# Altium PCB pcb_take1.PcbDoc (part 2 of 3)
Units mm, origin at the board's own origin, x right, y up, seen from the top; angles counter-clockwise.
Board outline 120 x 150 mm, 10 copper layers (Top Layer, Mid-Layer 1, Internal Plane 1, Internal Plane 2, Mid-Layer 2, MidLayer3, Mid-Layer 4, Mid-Layer 5, Mid-Layer 6, Bottom Layer); 173 components, 196 nets, 996 pads, 586 vias.
Unrouted connection lines stored in the file: 1.
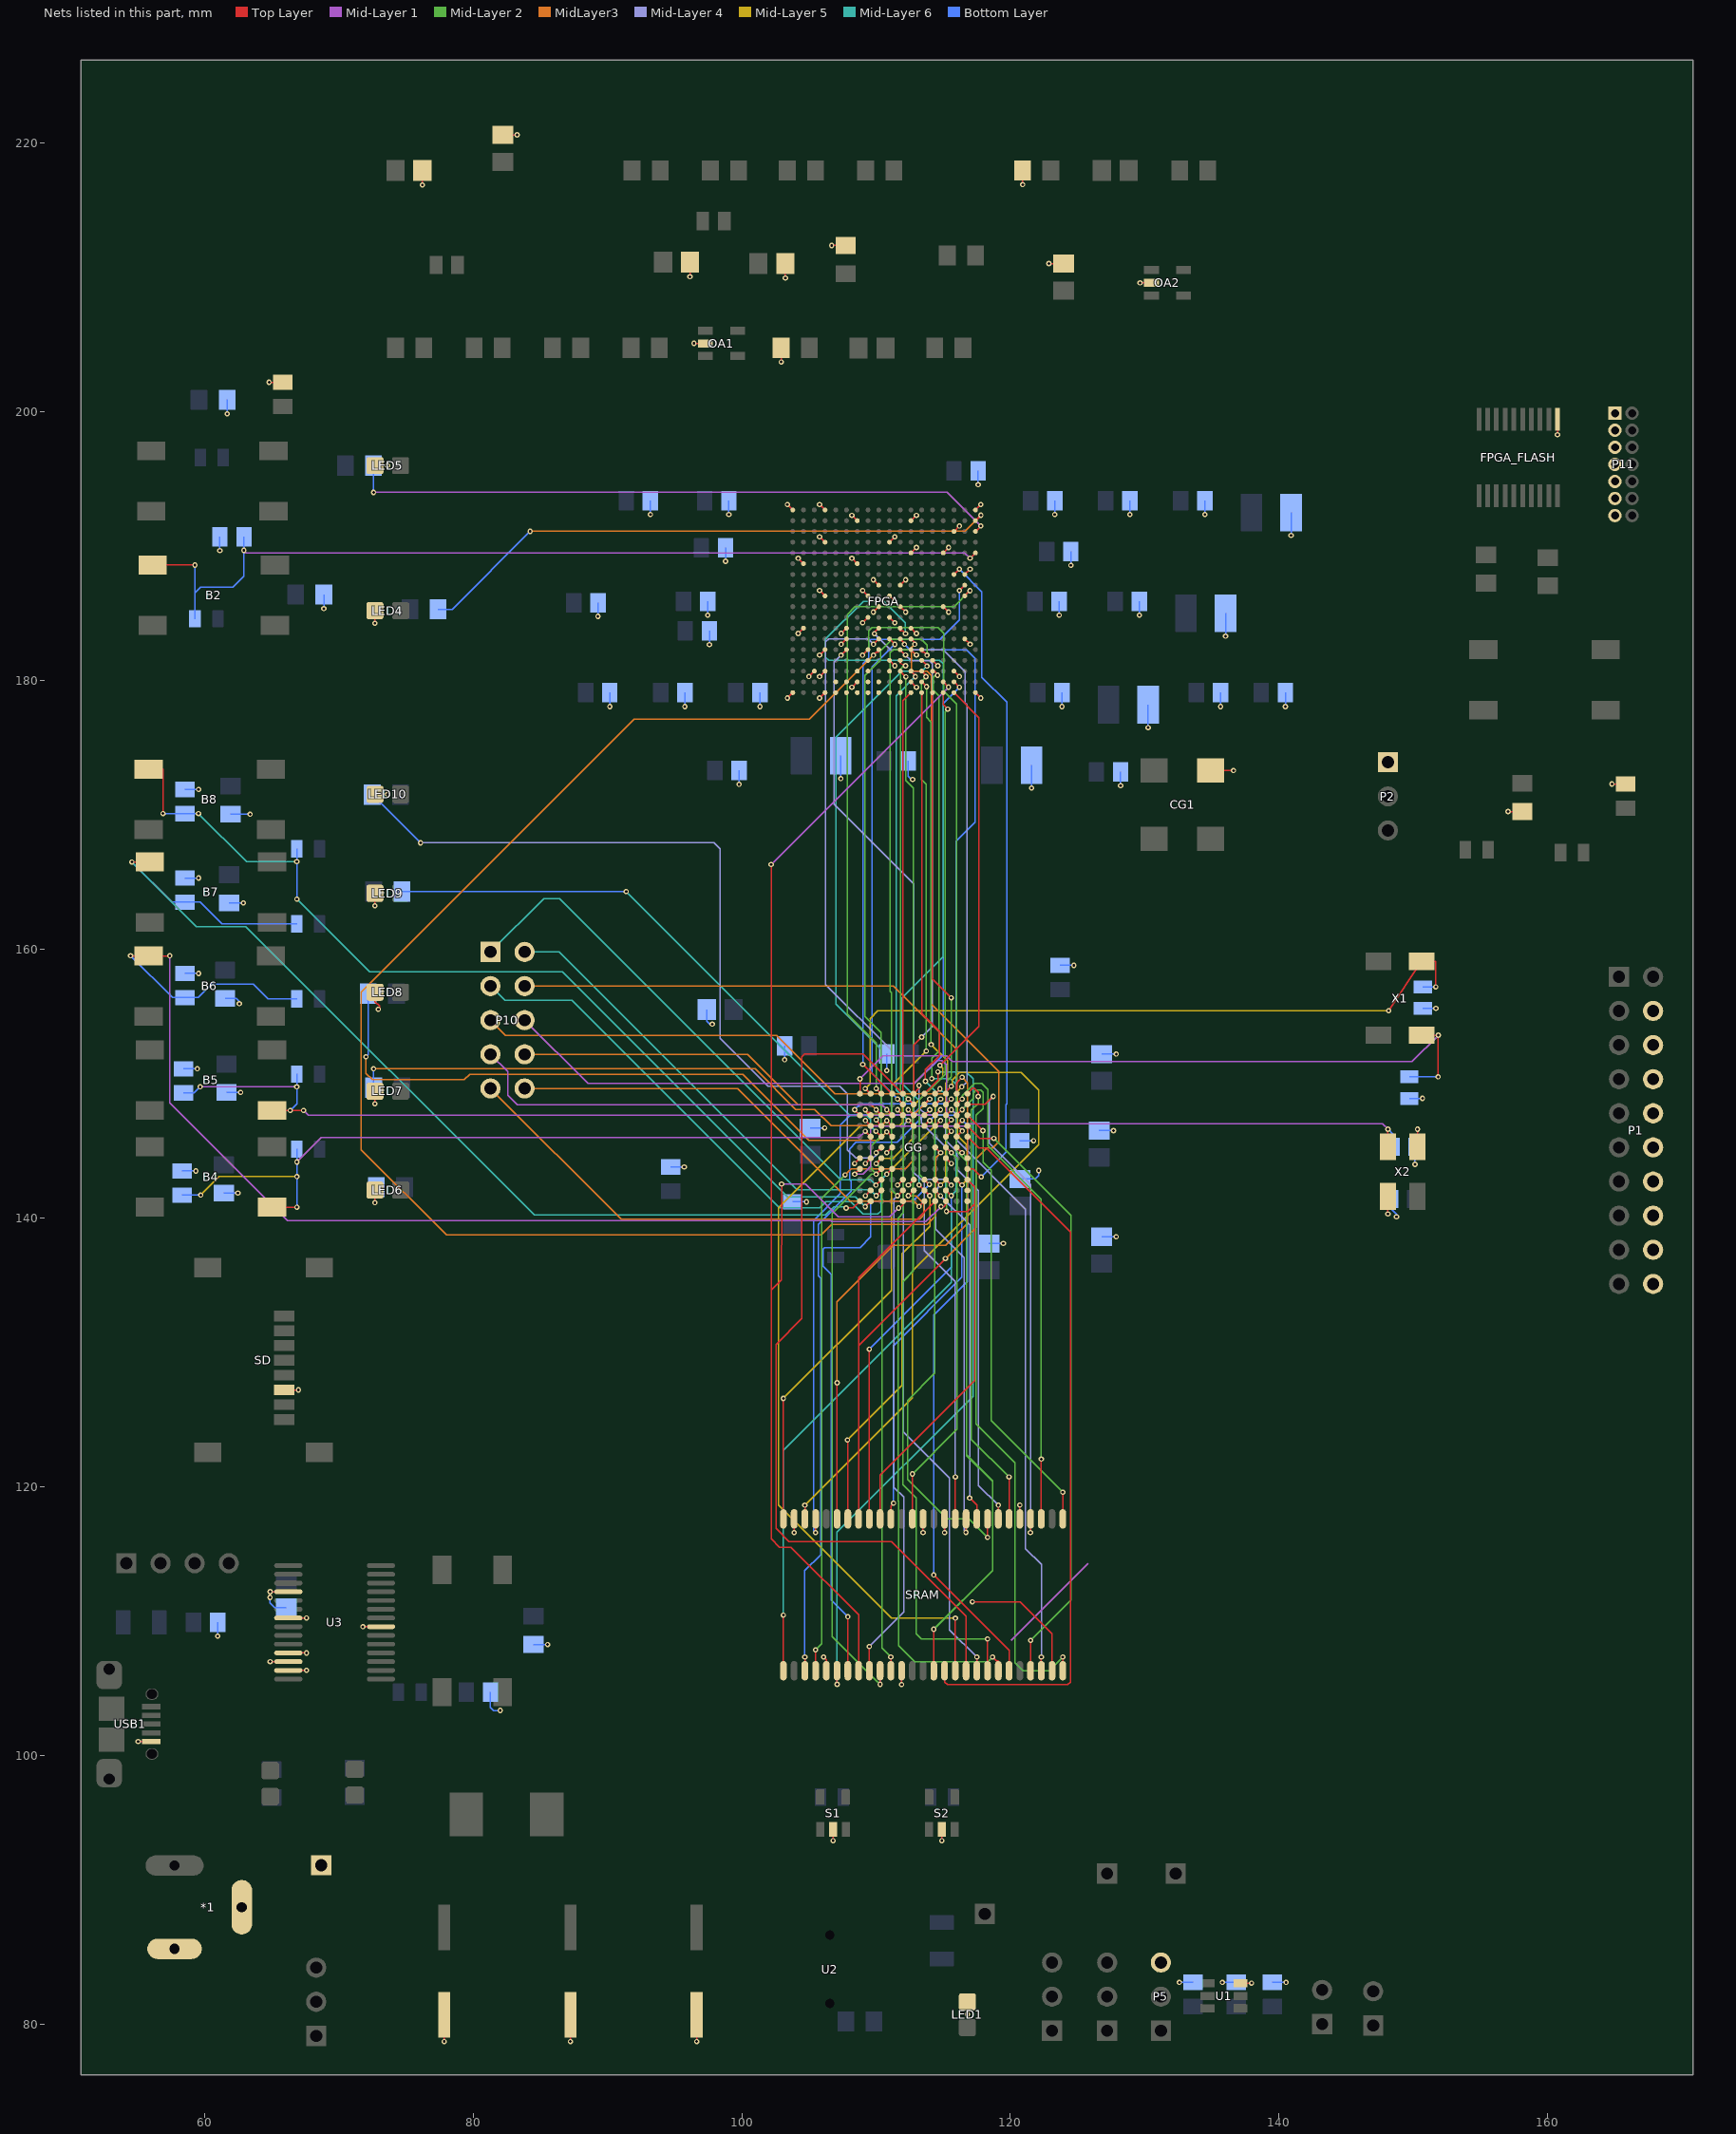
[diagram p10: the nets of this part, all layers, seen from the top]

## Via types
v1: diameter 0.4, hole 0.2, Top Layer to Bottom Layer, 586 vias

## Nets (pads, with @x,y where several pads share a name; then routed paths per layer and width w, separated by ;. In a path a pad name is that pad's centre, name@x,y a point inside that pad or via, vN(x,y) a via of type N, cw(c..) or ccw(c..) an arc to the next point about the centre after c; other vN are vias at no path point) (continued)
ARM_HFXTAL_P: C43.1 GG.L8 X2.1 | length 46.5
  Top Layer w0.1: v1(108.407,143.256) GG.L8@108.8,143.65 ; X2.1@148.1,145.3 148.1,146.601 v1(148.107,146.609)
  Mid-Layer 1 w0.1: v1(108.407,143.256) 109.042,143.256 109.601,143.815 109.601,146.71 109.728,146.837 116.611,146.837 116.789,147.015 147.701,147.015 v1(148.107,146.609)
  Bottom Layer w0.1: v1(148.107,146.609) 148.5,146.216 C43.1@148.5,145.3
ARM_LFXTAL_N: C42.2 GG.L1 X1.1 | length 53.6
  Top Layer w0.1: GG.L1@108.8,149.25 v1(108.8,150.354) ; v1(151.841,150.5) 151.841,153.591 X1.1@150.6,153.6 v1(151.85,153.6)
  Mid-Layer 1 w0.1: v1(108.8,150.354) 110.509,152.063 115.258,152.063 115.67,151.65 149.9,151.65 v1(151.85,153.6)
  Bottom Layer w0.1: C42.2@149.7,150.5 v1(151.841,150.5)
ARM_LFXTAL_P: C41.2 GG.K1 X1.2 | length 53.1
  Top Layer w0.1: v1(109.195,149.631) 109.219,149.631 GG.K1@109.6,149.25 ; v1(148.158,155.423) X1.2@150.6,159.1 151.663,159.1 v1(151.663,157.2)
  Mid-Layer 5 w0.1: v1(109.195,149.631) 109.55,149.987 109.55,154.838 110.134,155.423 v1(148.158,155.423)
  Bottom Layer w0.1: C41.2@150.7,157.2 v1(151.663,157.2)
CTRL_BUS0: FPGA.C7 GG.A8 | length 49.3
  Top Layer w0.1: FPGA.C7@115.8,187.9 116.19,188.29 v1(116.205,188.29) ; GG.A8@116.8,143.65 117.233,143.65 v1(117.831,143.053)
  Bottom Layer w0.1: v1(116.205,188.29) 117.881,186.614 117.881,180.238 119.736,178.384 119.736,148.514 119.659,148.438 119.659,144.882 v1(117.831,143.053)
CTRL_BUS1: FPGA.B8 GG.H1 | length 44.9
  Top Layer w0.1: v1(109.017,151.433) GG.H1@111.2,149.25 ; v1(116.198,186.698) FPGA.B8@116.6,187.1
  Bottom Layer w0.1: v1(109.017,151.433) 109.017,181.254 109.449,181.686 109.449,182.88 109.626,183.058 114.757,183.058 116.198,184.499 v1(116.198,186.698)
CTRL_BUS2: FPGA.B9 GG.J1 | length 47.2
  Top Layer w0.1: v1(110.007,149.631) 110.019,149.631 GG.J1@110.4,149.25 ; FPGA.B9@116.6,186.3 116.99,186.69 v1(116.992,186.69)
  Mid-Layer 2 w0.1: v1(110.007,149.631) 110.007,153.01 107.848,155.169 107.848,184.912 108.433,185.496 115.799,185.496 v1(116.992,186.69)
EBI_A0: FPGA.F15 GG.J4 | length 40.2
  Top Layer w0.1: v1(110.007,147.295) 110.007,147.243 GG.J4@110.4,146.85 ; FPGA.F15@113.4,181.5 113.792,181.108 v1(113.792,181.077)
  Mid-Layer 6 w0.1: v1(110.007,147.295) 110.363,147.65 110.363,152.552 107.01,155.905 107.01,175.793 111.912,180.696 113.411,180.696 v1(113.792,181.077)
EBI_A1: FPGA.F16 GG.K3 | length 37.3
  Top Layer w0.1: v1(109.195,148.057) 109.398,147.853 109.6,147.853 GG.K3@109.6,147.65 ; FPGA.F16@113.4,180.7 113.716,180.384 v1(113.716,180.289)
  Mid-Layer 2 w0.1: v1(113.716,180.289) 113.36,179.934 113.36,172.651 113.741,172.27 v1(113.741,152.425)
  Mid-Layer 5 w0.1: v1(109.195,148.057) 109.195,147.93 109.423,147.701 110.947,147.701 111.15,147.904 111.15,149.835 v1(113.741,152.425)
EBI_A2: FPGA.C17 GG.L3 | length 38
  Top Layer w0.1: v1(108.407,148.057) 108.407,148.043 GG.L3@108.8,147.65 ; FPGA.C17@115.8,179.9 116.198,179.502 v1(116.205,179.502)
  Bottom Layer w0.1: v1(108.407,148.057) 108.839,148.488 112.573,148.488 112.827,148.742 112.827,149.994 114.986,152.153 114.986,178.283 v1(116.205,179.502)
EBI_A3: FPGA.C18 GG.J7 SRAM.11 | length 78.4
  Top Layer w0.1: v1(110.007,144.043) 110.007,144.057 GG.J7@110.4,144.45 ; SRAM.11@111.1,106.3 v1(111.1,107.315) ; v1(114.757,151.359) 117.653,154.254 117.653,177.247 FPGA.C18@115.8,179.1
  Mid-Layer 2 w0.1: v1(110.007,144.043) 110.439,143.612 110.439,107.976 v1(111.1,107.315)
  Mid-Layer 5 w0.1: v1(110.007,144.043) 110.388,144.424 111.252,144.424 112.751,145.923 112.751,148.322 114.955,150.526 114.955,151.161 v1(114.757,151.359)
EBI_A4: FPGA.F14 GG.J8 SRAM.10 | length 88.4
  Top Layer w0.1: v1(110.007,143.257) GG.J8@110.4,143.65 ; v1(110.3,105.283) SRAM.10@110.3,106.3 ; FPGA.F14@113.4,182.3 113.4,182.093 113.589,182.093 v1(113.792,181.889)
  Mid-Layer 2 w0.1: v1(110.3,105.283) 106.731,108.852 106.731,140.335 109.652,143.257 v1(110.007,143.257) 109.626,143.637 109.626,145.364 110.363,146.101 110.363,153.797 109.169,154.991 109.169,180.361 110.342,181.534 110.342,182.224 111.176,183.058 113.386,183.058 113.792,182.651 v1(113.792,181.889)
EBI_A5: FPGA.G14 GG.G10 SRAM.9 | length 80.8
  Top Layer w0.1: SRAM.9@109.5,106.3 v1(109.5,108.102) ; v1(111.6,141.656) 111.606,141.656 GG.G10@112,142.05 ; FPGA.G14@112.6,182.3 112.995,181.905 v1(113.005,181.905)
  Mid-Layer 2 w0.1: v1(111.6,141.656) 111.15,142.105 111.15,156.769 111.049,156.87 111.049,182.067 111.277,182.296 112.614,182.296 v1(113.005,181.905)
  Mid-Layer 4 w0.1: v1(109.5,108.102) 112.059,110.662 112.059,119.224 111.334,119.949 111.334,141.39 v1(111.6,141.656)
EBI_A6: FPGA.D17 GG.G11 SRAM.8 | length 101.3
  Top Layer w0.1: v1(102.192,166.308) 102.192,134.628 ; v1(102.972,142.519) 102.972,140.589 102.946,135.382 102.192,134.628 ; SRAM.8@108.7,106.3 108.7,110.465 103.671,115.494 102.819,115.494 102.192,116.121 102.192,134.628 ; v1(111.684,140.741) 111.76,140.741 112,140.981 GG.G11@112,141.25 ; FPGA.D17@115,179.9 v1(115.392,179.508)
  Mid-Layer 1 w0.1: v1(102.192,166.308) v1(115.392,179.508) ; v1(102.972,142.519) 104.75,142.519 107.198,140.071 111.014,140.071 v1(111.684,140.741)
EBI_A7: FPGA.D18 GG.E9 SRAM.7 | length 81.9
  Top Layer w0.1: SRAM.7@107.9,106.3 v1(107.9,110.312) ; GG.E9@113.6,142.85 113.956,142.494 v1(113.97,142.494) ; FPGA.D18@115,179.1 115,178.218 v1(115.341,177.876)
  Mid-Layer 2 w0.1: v1(113.97,142.494) 113.25,143.214 113.25,148.81 115.138,150.698 115.138,177.673 v1(115.341,177.876)
  Bottom Layer w0.1: v1(107.9,110.312) 106.655,111.558 106.655,135.814 106.046,136.422 106.046,137.669 106.172,137.795 108.814,137.795 109.601,138.582 109.601,141.021 109.83,141.249 112.725,141.249 v1(113.97,142.494)
EBI_A8: FPGA.H12 GG.E10 SRAM.48 | length 87.9
  Top Layer w0.1: v1(107.874,123.47) 107.9,123.444 SRAM.48@107.9,117.6 ; FPGA.H12@111.8,183.9 111.8,183.693 111.989,183.693 v1(112.192,183.49) ; v1(113.198,142.452) GG.E10@113.6,142.05 v1(113.995,141.655)
  Mid-Layer 5 w0.1: v1(107.874,123.47) 111.938,127.534 111.938,137.312 113.995,139.37 v1(113.995,141.655)
  Mid-Layer 6 w0.1: v1(112.192,183.49) 112.192,184.302 110.592,185.903 109.068,185.903 106.248,183.083 106.248,181.737 106.477,181.508 114.732,181.508 114.986,181.254 114.986,159.443 111.875,156.332 111.875,150.065 113.198,148.742 v1(113.198,142.452)
EBI_A9: FPGA.G13 GG.D11 SRAM.47 | length 86.7
  Top Layer w0.1: SRAM.47@108.7,117.6 108.7,130.519 ; FPGA.G13@112.6,183.1 112.878,182.822 v1(112.878,182.702) ; GG.D11@114.4,141.25 108.7,135.55 108.7,130.519 ; v1(115.164,136.982) 108.7,130.519
  MidLayer3 w0.1: v1(112.878,182.702) 112.649,182.474 112.649,180.823 112.776,180.696 113.817,180.696 114.122,180.391 114.122,155.905 119.126,150.901 119.126,145.669 118.669,145.212 118.262,145.212 117.45,144.399 117.45,139.268 v1(115.164,136.982)
EBI_A10: FPGA.E16 GG.C10 SRAM.46 | length 68.8
  Top Layer w0.1: SRAM.46@109.5,117.6 v1(109.5,130.234) ; FPGA.E16@114.2,180.7 114.376,180.7 v1(114.579,180.391) ; GG.C10@115.2,142.05 v1(115.595,141.656)
  Mid-Layer 2 w0.1: v1(114.148,150.368) 114.148,151.892 114.683,152.427 114.683,178.865 114.249,179.299 114.249,180.238 114.402,180.391 v1(114.579,180.391)
  Mid-Layer 6 w0.1: v1(114.148,150.368) 115.545,150.368 115.951,149.962 115.951,142.011 v1(115.595,141.656)
  Bottom Layer w0.1: v1(109.5,130.234) 115.595,136.329 v1(115.595,141.656)
EBI_A11: FPGA.E18 GG.A9 SRAM.45 | length 70.1
  Top Layer w0.1: SRAM.45@110.3,117.6 110.3,120.841 117.348,127.889 117.348,141.021 ; FPGA.E18@114.2,179.1 114.2,157.783 v1(115.595,156.388) ; v1(115.24,140.487) 116.815,140.487 117.348,141.021 ; GG.A9@116.8,142.85 117.348,142.302 117.348,141.021
  Mid-Layer 2 w0.1: v1(115.24,140.487) 115.24,150.165 115.595,150.52 v1(115.595,156.388)
EBI_A12: FPGA.K12 GG.B9 SRAM.44 | length 75.1
  Top Layer w0.1: v1(109.88,183.49) 109.88,183.58 FPGA.K12@110.2,183.9 ; SRAM.44@111.1,117.6 111.1,118.568 v1(111.303,118.77) ; GG.B9@116,142.85 v1(116.395,142.455)
  Mid-Layer 4 w0.1: v1(109.88,183.49) 111.074,182.296 115.011,182.296 116.637,180.67 116.637,178.333 116.764,178.206 116.764,150.139 v1(116.383,149.758)
  Mid-Layer 5 w0.1: v1(116.383,149.758) 116.053,149.428 116.053,146.126 116.764,145.415 116.764,142.824 v1(116.395,142.455)
  Bottom Layer w0.1: v1(111.303,118.77) 111.303,130.488 116.395,135.58 v1(116.395,142.455)
EBI_A13: FPGA.K13 GG.C9 SRAM.38 | length 77.4
  Top Layer w0.1: v1(109.802,182.702) FPGA.K13@110.2,183.1 ; GG.C9@115.2,142.85 115.595,142.455 v1(115.595,142.443) ; SRAM.38@115.9,117.6 v1(115.9,120.726)
  Mid-Layer 4 w0.1: v1(109.802,182.702) 109.396,183.109 106.477,183.109 106.248,182.88 106.248,157.378 111.15,152.476 111.15,147.853 111.354,147.65 112.627,147.65 112.754,147.523 112.754,143.459 113.338,142.875 113.792,142.875 ; v1(115.595,142.443) 115.164,142.875 113.792,142.875 ; v1(115.9,120.726) 115.9,135.28 113.589,137.592 113.589,142.672 113.792,142.875
EBI_A14: FPGA.F17 GG.D9 SRAM.37 | length 67
  Top Layer w0.1: FPGA.F17@113.4,179.9 v1(113.757,179.543) ; GG.D9@114.4,142.85 v1(114.8,142.45) ; v1(116.688,116.598) 116.7,116.611 SRAM.37@116.7,117.6
  Mid-Layer 2 w0.1: v1(113.757,179.543) 113.757,177.27 114.097,176.93 v1(114.097,152.908)
  Mid-Layer 4 w0.1: v1(114.8,142.45) 114.427,142.077 114.427,139.15 116.542,137.035 116.542,116.744 v1(116.688,116.598)
  Mid-Layer 5 w0.1: v1(114.097,152.908) 115.309,151.696 115.309,150.172 115.164,150.027 115.164,142.814 v1(114.8,142.45)
EBI_A15: FPGA.F18 GG.D10 SRAM.36 | length 64.6
  Top Layer w0.1: FPGA.F18@113.4,179.1 113.4,155.224 114.703,153.921 114.703,152.069 113.676,151.042 v1(113.676,150.18) ; GG.D10@114.4,142.05 v1(114.8,141.65) ; v1(116.967,119.151) 117.5,118.618 SRAM.36@117.5,117.6
  Mid-Layer 4 w0.1: v1(114.8,141.65) 116.967,139.483 v1(116.967,119.151)
  Mid-Layer 6 w0.1: v1(113.676,150.18) 114.402,149.454 114.402,142.048 v1(114.8,141.65)
EBI_A16: FPGA.H13 GG.E4 SRAM.35 | length 80.2
  Top Layer w0.1: FPGA.H13@111.8,183.1 112.116,182.784 v1(112.116,182.702) ; GG.E4@113.6,146.85 113.994,147.244 v1(113.995,147.244) ; v1(118.3,116.23) SRAM.35@118.3,117.6
  Mid-Layer 2 w0.1: v1(113.995,147.244) 114.376,146.863 114.376,128.448 112.344,126.416 112.344,120.53 115.272,117.602 116.928,117.602 v1(118.3,116.23)
  Bottom Layer w0.1: v1(112.116,182.702) 112.522,182.296 116.738,182.296 117.373,181.661 117.373,169.469 115.951,168.046 115.951,147.777 115.824,147.65 114.402,147.65 v1(113.995,147.244)
EBI_A17: FPGA.H14 GG.F1 SRAM.34 | length 71.6
  Top Layer w0.1: FPGA.H14@111.8,182.3 v1(112.192,181.908) ; v1(113.2,149.853) 113.2,149.65 GG.F1@112.8,149.25 112.8,152.87 v1(113.391,153.461) ; SRAM.34@119.1,117.6 v1(119.1,118.618)
  Mid-Layer 4 w0.1: v1(112.192,181.908) 112.642,181.458 113.97,181.458 114.173,181.254 114.173,154.243 v1(113.391,153.461) ; v1(113.2,149.853) 113.2,148.191 113.716,147.676 115.037,147.676 115.189,147.523 115.189,145.762 116.025,144.926 116.025,143.614 117.627,142.011 117.627,120.091 v1(119.1,118.618)
EBI_A18: FPGA.H15 GG.F2 SRAM.21 | length 83.9
  Top Layer w0.1: FPGA.H15@111.8,181.5 111.8,181.305 v1(112.192,181.102) ; v1(112.395,148.844) v1(112.406,148.844) GG.F2@112.8,148.45 ; v1(118.669,107.315) 118.948,107.036 119.1,107.036 SRAM.21@119.1,106.3
  Mid-Layer 2 w0.1: v1(112.192,181.102) 112.065,181.102 111.811,180.848 111.811,149.439 v1(112.406,148.844) ; v1(112.395,148.844) 112.034,148.483 112.034,140.391 111.633,139.991 111.633,118.948 111.684,118.897 111.684,108.153 112.878,106.959 118.313,106.959 v1(118.669,107.315)
EBI_A19: FPGA.H16 GG.F3 SRAM.20 | length 94.4
  Top Layer w0.1: FPGA.H16@111.8,180.7 v1(112.217,180.283) ; v1(112.395,148.057) 112.395,148.055 GG.F3@112.8,147.65 ; SRAM.20@118.3,106.3 v1(118.3,108.661)
  Mid-Layer 2 w0.1: v1(112.217,180.283) 112.217,172.568 112.776,172.009 112.776,136.042 111.989,135.255 ; v1(112.395,148.057) 112.751,147.701 112.751,136.068 111.989,135.255 ; v1(118.3,108.661) 113.386,108.661 112.979,109.068 112.979,119.151 111.989,120.142 111.989,135.255
EBI_A20: FPGA.G16 GG.F4 SRAM.19 | length 78.5
  Top Layer w0.1: v1(112.4,147.25) GG.F4@112.8,146.85 ; FPGA.G16@112.6,180.7 112.928,180.372 v1(112.928,180.289) ; SRAM.19@117.5,106.3 v1(117.5,107.315)
  Mid-Layer 4 w0.1: v1(112.4,147.25) 112.039,146.889 112.039,124.079 115.468,120.65 115.468,109.347 v1(117.5,107.315)
  Mid-Layer 6 w0.1: v1(112.4,147.25) 112.039,147.611 112.039,148.996 111.506,149.53 111.506,178.867 v1(112.928,180.289)
EBI_A21: FPGA.G18 GG.G1 SRAM.18 | length 95.8
  Top Layer w0.1: FPGA.G18@112.6,179.1 112,178.5 GG.G1@112,149.25 109.028,152.222 104.699,152.222 104.47,151.994 104.47,132.512 102.546,130.588 102.546,116.885 103.505,115.926 111.137,115.926 116.7,110.363 SRAM.18@116.7,106.3
EBI_A22: FPGA.J13 GG.G2 SRAM.17 | length 92.9
  Top Layer w0.1: FPGA.J13@111,183.1 111.398,182.702 v1(111.398,182.696) ; v1(111.6,148.85) GG.G2@112,148.45 ; SRAM.17@115.9,106.3 v1(115.9,110.211)
  Mid-Layer 5 w0.1: v1(111.6,148.85) 111.963,148.487 111.963,147.066 111.76,146.863 108.839,146.863 102.743,140.767 102.743,118.618 111.15,110.211 v1(115.9,110.211)
  Bottom Layer w0.1: v1(111.398,182.696) 109.703,181 109.703,150.747 v1(111.6,148.85)
EBI_AD0: GG.B4 SRAM.22 | length 45.1
  Top Layer w0.1: v1(114.3,113.423) 119.9,107.823 SRAM.22@119.9,106.3 ; GG.B4@116,146.85 v1(116.419,147.269)
  Bottom Layer w0.1: v1(114.3,113.423) 114.3,132.777 116.789,135.266 116.789,146.899 v1(116.419,147.269)
EBI_AD1: GG.A4 SRAM.24 | length 53.7
  Top Layer w0.1: GG.A4@116.8,146.85 117.727,145.923 v1(118.77,145.923) ; SRAM.24@121.5,106.3 v1(121.5,108.56)
  Mid-Layer 1 w0.1: 120.04,108.56 125.781,114.3
  Mid-Layer 2 w0.1: v1(118.77,145.923) 124.511,140.183 124.511,111.57 v1(121.5,108.56)
EBI_AD2: GG.C3 SRAM.25 | length 45.1
  Top Layer w0.1: GG.C3@115.2,147.65 115.6,148.05 v1(115.6,148.057) ; SRAM.25@122.3,106.3 v1(122.301,107.315) v1(122.301,107.315)
  Mid-Layer 4 w0.1: v1(115.6,148.057) 115.956,147.701 115.956,145.842 121.133,140.665 121.133,115.392 122.301,114.224 v1(122.301,107.315)
EBI_AD3: GG.B3 SRAM.27 | length 52.1
  Top Layer w0.1: GG.B3@116,147.65 116.407,148.057 v1(116.408,148.057) ; SRAM.27@123.9,106.3 123.9,107.313 v1(123.901,107.314)
  Mid-Layer 2 w0.1: v1(116.408,148.057) 117.222,148.871 117.222,149.278 117.45,149.506 117.802,149.506 117.956,149.352 117.956,148.145 117.458,147.648 117.458,124.68 120.345,121.793 120.345,106.883 120.928,106.3 122.888,106.3 v1(123.901,107.314)
EBI_AD4: GG.A3 SRAM.28 | length 33
  Top Layer w0.1: GG.A3@116.8,147.65 v1(117.956,146.494) ; SRAM.28@123.9,117.6 v1(123.9,119.583)
  Mid-Layer 2 w0.1: v1(117.956,146.494) 117.956,144.152 118.562,143.547 118.562,124.922 v1(123.9,119.583)
EBI_AD5: GG.B2 SRAM.30 | length 36.9
  Top Layer w0.1: GG.B2@116,148.45 116.394,148.844 v1(116.408,148.844) ; SRAM.30@122.3,117.6 v1(122.3,122.047)
  Mid-Layer 2 w0.1: v1(116.408,148.844) 116.408,149.095 117.328,150.015 117.856,150.015 118.31,149.561 118.31,145.39 122.3,141.401 v1(122.3,122.047)
EBI_AD6: GG.A2 SRAM.31 | length 37
  Top Layer w0.1: GG.A2@116.8,148.45 118.122,148.45 v1(118.72,149.047) ; v1(121.488,116.586) 121.5,116.598 SRAM.31@121.5,117.6
  Mid-Layer 4 w0.1: v1(118.72,149.047) 118.42,148.748 118.42,145.573 121.488,142.505 v1(121.488,116.586)
EBI_AD7: GG.A1 SRAM.33 | length 34.2
  Top Layer w0.1: GG.A1@116.8,149.25 117.207,149.657 117.297,149.657 117.602,149.352 v1(117.602,149.047) ; SRAM.33@119.9,117.6 v1(119.9,120.726)
  Mid-Layer 2 w0.1: v1(117.602,149.047) 117.602,148.532 117.104,148.034 117.104,123.522 v1(119.9,120.726)
EBI_AD8: GG.B1 SRAM.49 | length 40.7
  Top Layer w0.1: SRAM.49@107.1,117.6 v1(107.1,127.737) ; GG.B1@116,149.25 116,150.061 v1(116.408,150.47)
  MidLayer3 w0.1: v1(107.1,127.737) 107.1,133.77 111.303,137.973 115.189,137.973 116.815,139.598 116.815,150.063 v1(116.408,150.47)
EBI_AD9: GG.C2 SRAM.51 | length 41.9
  Top Layer w0.1: v1(105.5,116.586) SRAM.51@105.5,117.6 ; GG.C2@115.2,148.45 115.594,148.844 v1(115.595,148.844)
  Bottom Layer w0.1: v1(105.5,116.586) 105.338,116.748 105.338,139.806 107.346,141.814 107.346,146.919 108.102,147.676 112.751,147.676 113.563,148.488 115.24,148.488 v1(115.595,148.844)
EBI_AD10: GG.C1 SRAM.52 | length 47.5
  Top Layer w0.1: SRAM.52@104.7,117.6 v1(104.7,118.618) ; GG.C1@115.2,149.25 115.341,149.555 v1(115.595,149.809)
  Mid-Layer 5 w0.1: v1(104.7,118.618) 112.7,126.618 112.7,136.042 122.098,145.44 122.098,149.504 120.783,150.82 116.205,150.82 115.663,150.277 115.663,149.877 v1(115.595,149.809)
EBI_AD11: GG.D2 SRAM.54 | length 36.7
  Top Layer w0.1: SRAM.54@103.1,117.6 v1(103.1,126.57) ; GG.D2@114.4,148.45 114.794,148.844 v1(114.808,148.844)
  Mid-Layer 5 w0.1: v1(103.1,126.57) 111.15,134.62 111.15,143.612 114.402,146.863 114.402,148.438 v1(114.808,148.844)
EBI_AD12: GG.D1 SRAM.1 | length 49.3
  Top Layer w0.1: SRAM.1@103.1,106.3 v1(103.1,110.439) ; GG.D1@114.4,149.25 v1(114.757,149.606)
  Mid-Layer 6 w0.1: v1(103.1,110.439) 103.1,122.709 115.595,135.204 115.595,140.843 115.164,141.275 115.164,149.2 v1(114.757,149.606)
EBI_AD13: GG.E3 SRAM.3 | length 48.2
  Top Layer w0.1: v1(104.699,107.315) v1(104.699,107.315) SRAM.3@104.7,106.3 ; GG.E3@113.6,147.65 113.995,148.045 v1(113.995,148.057)
  Bottom Layer w0.1: v1(104.699,107.315) 104.699,113.767 105.867,114.935 105.867,135.51 105.692,135.685 105.692,139.525 108.153,141.986 108.153,142.748 108.052,142.85 108.052,143.916 108.026,143.942 108.026,145.136 108.509,145.618 111.557,145.618 v1(113.995,148.057)
EBI_AD14: GG.E2 SRAM.4 | length 49
  Top Layer w0.1: SRAM.4@105.5,106.3 v1(105.5,107.848) ; GG.E2@113.6,148.45 v1(113.995,148.844)
  Mid-Layer 2 w0.1: v1(105.5,107.848) 105.943,108.292 105.943,141.453 v1(107.696,143.205)
  MidLayer3 w0.1: v1(107.696,143.205) 108.153,143.662 112.166,143.662 112.751,144.247 112.751,147.599 v1(113.995,148.844)
EBI_AD15: GG.E1 SRAM.6 | length 55.2
  Top Layer w0.1: v1(107.1,105.283) SRAM.6@107.1,106.3 ; GG.E1@113.6,149.25 114.605,150.255 v1(114.605,150.876)
  Mid-Layer 6 w0.1: v1(107.1,105.283) 107.1,116.6 117.221,126.721 117.221,150.368 116.713,150.876 v1(114.605,150.876)
EBI_CS0: FPGA.K14 GG.D6 | length 112.3
  Top Layer w0.1: v1(109.804,181.889) 110.007,182.093 110.2,182.093 FPGA.K14@110.2,182.3 ; GG.D6@114.4,145.25 114.8,144.85 v1(114.808,144.85)
  MidLayer3 w0.1: v1(109.804,181.889) 105.029,177.114 91.999,177.114 71.679,156.794 71.679,145.085 78.029,138.735 105.918,138.735 106.705,139.522 113.792,139.522 114.427,140.157 114.427,144.469 v1(114.808,144.85)
EBI_CS1: GG.A5 SRAM.16 | length 54.5
  Top Layer w0.1: SRAM.16@115.1,106.3 115.1,105.461 115.303,105.258 124.257,105.258 124.46,105.461 124.46,138.961 118.215,145.206 117.644,145.206 GG.A5@116.8,146.05
EBI_D0: FPGA.P18
EBI_D1: FPGA.P17
EBI_D2: FPGA.N18
EBI_D3: FPGA.N17
EBI_D4: FPGA.M18
EBI_D5: FPGA.M16
EBI_D6: FPGA.L18
EBI_D7: FPGA.L17
EBI_D8: FPGA.K18
EBI_D9: FPGA.K17
EBI_D10: FPGA.J18
EBI_D11: FPGA.J16
EBI_D12: FPGA.H18
EBI_D13: FPGA.H17
EBI_D14: FPGA.L16
EBI_D15: FPGA.L15
EBI_REN: FPGA.N14 GG.C6 SRAM.42 | length 70.8
  Top Layer w0.1: v1(107.391,181.889) 107.391,181.891 FPGA.N14@107.8,182.3 ; SRAM.42@112.7,117.6 v1(112.7,120.945) ; GG.C6@115.2,145.25 v1(115.6,144.85)
  Mid-Layer 2 w0.1: v1(112.7,120.945) 116.027,124.272 116.027,144.423 v1(115.6,144.85)
  Mid-Layer 4 w0.1: v1(107.391,181.889) 106.858,181.356 106.858,170.815 112.827,164.846 112.827,147.958 113.362,147.423 113.362,147.088 v1(115.6,144.85)
EBI_WEN: FPGA.L14 GG.B6 SRAM.15 | length 105.9
  Top Layer w0.1: v1(108.991,181.889) 108.991,181.891 FPGA.L14@109.4,182.3 ; SRAM.15@114.3,106.3 v1(114.3,109.372) v1(114.3,109.398) ; GG.B6@116,145.25 v1(116.4,144.85)
  Mid-Layer 2 w0.1: v1(108.991,181.889) 109.449,182.347 109.449,183.693 109.703,183.947 114.605,183.947 115.037,183.515 115.037,179.222 115.993,178.266 115.993,144.967 116.75,144.21 ; v1(114.3,109.372) 118.694,113.767 118.694,120.372 118.669,120.398 ; v1(114.3,109.398) 118.669,113.767 118.669,120.398 ; v1(116.4,144.85) 116.75,144.5 116.75,144.21 ; 116.75,122.366 116.75,144.21 ; 116.75,122.366 116.75,122.316 118.669,120.398 ; 116.75,122.366 118.669,120.447 118.669,120.398
GND: 1.2 2.2 3.2 *1.2 *1.3 C1.2 C2.1 C3.1 C4.1 C5.1 C6.1 C7.1 C8.1 C9.1 C10.1 C11.1 C12.1 C13.1 C14.1 C15.1 C16.1 C17.1 C18.1 C19.1 C20.1 C21.1 C22.1 C23.1 C24.1 C25.1 C26.1 C27.1 C28.1 C29.1 C30.1 C31.1 C32.1 C33.1 C34.1 C35.1 C36.1 C37.1 C38.1 C39.1 C40.1 C41.1 C42.1 C43.2 C44.2 C45.2 C46.1 C47.2 C48.1 C49.1 C50.1 C51.1 C52.2 C53.1 C54.1 C55.1 C56.1 C57.1 C58.1 C59.1 C60.1 C63.2 C66.2 C67.1 CG1.2 FPGA.A1 FPGA.A18 FPGA.B7 FPGA.B13 FPGA.C3 FPGA.C16 FPGA.D5 FPGA.D10 FPGA.E15 FPGA.G2 FPGA.G5 FPGA.G12 FPGA.G17 FPGA.H8 FPGA.H10 FPGA.J4 FPGA.J9 FPGA.J11 FPGA.J15 FPGA.K8 FPGA.K10 FPGA.L9 FPGA.L11 FPGA.M2 FPGA.M6 FPGA.M17 FPGA.N12 FPGA.N13 FPGA.R1 FPGA.R4 FPGA.R9 FPGA.R14 FPGA.R16 FPGA.R18 FPGA.T16 FPGA.U6 FPGA.U12 FPGA.V1 FPGA.V18 FPGA_FLASH.11 GG.C7 GG.D4 GG.F9 GG.G3 GG.G9 GG.H6 GG.K4 GG.K7 GG.K10 GG.L7 J4.1 LED1.K LED4.K LED5.K LED6.K LED7.K LED8.K LED9.K LED10.K OA1.2 OA2.2 P1.4 P1.6 P1.8 P1.10 P1.12 P1.14 P1.16 P1.18 P1.20 P2.1 P5.3 P11.1 P11.3 P11.5 P11.7 P11.9 P11.11 P11.13 R8.2 R11.2 R14.2 R20.2 R21.2 R22.2 R23.2 R24.2 R31.1 R37.2 R39.1 R48.2 S1.2 S2.2 SD.6 SRAM.5 SRAM.12 SRAM.26 SRAM.32 SRAM.39 SRAM.41 SRAM.53 U1.6 U2.2 U3.7 U3.18 U3.21 U3.25 U3.26 U3.27 USB1.5 X2.2 X2.4 | length 163.4
  Top Layer w0.1: v1(55.075,101.025) USB1.5@56.05,101.025 ; v1(64.825,202.2) C55.1@65.85,202.2 ; v1(64.9,106.975) U3.26@66.25,106.975 ; v1(64.9,112.175) U3.18@66.25,112.175 ; SD.6@65.95,127.2 v1(67,127.2) ; U3.27@66.25,106.325 v1(67.6,106.325) ; U3.25@66.25,107.625 v1(67.6,107.625) ; U3.21@66.25,110.225 v1(67.6,110.225) ; v1(71.8,109.575) U3.7@73.15,109.575 ; v1(72.697,141.133) LED6.K@72.697,142.068 ; v1(72.697,148.499) LED7.K@72.697,149.434 ; LED8.K@72.697,156.8 72.697,156.103 73.032,155.769 73.032,155.612 v1(72.949,155.529) ; v1(72.697,163.231) LED9.K@72.697,164.166 ; LED10.K@72.697,171.532 v1(73.633,171.532) ; v1(72.697,184.265) LED4.K@72.697,185.2 ; LED5.K@72.697,196 v1(73.633,196) ; v1(76.226,216.887) C66.2@76.226,217.962 ; v1(77.851,78.697) C48.1@77.851,80.697 ; 3.2@82.211,220.613 v1(83.286,220.613) ; v1(87.249,78.697) C49.1@87.249,80.697 ; v1(96.147,210.06) 1.2@96.147,211.135 ; v1(96.45,205.1) OA1.2@97.3,205.1 ; v1(96.647,78.697) C50.1@96.647,80.697 ; v1(102.938,203.712) R31.1@102.938,204.762 ; v1(103.247,209.96) 2.2@103.247,211.035 ; v1(103.4,178.7) FPGA.V18@103.8,179.1 ; v1(103.4,193.1) FPGA.V1@103.8,192.7 ; v1(103.9,116.575) SRAM.53@103.9,117.6 ; v1(104.2,183.5) FPGA.U12@104.6,183.9 ; v1(104.2,189.1) FPGA.U6@104.6,188.7 ; v1(105,180.3) FPGA.T16@105.4,180.7 ; v1(105.8,178.7) FPGA.R18@106.2,179.1 ; v1(105.8,180.3) FPGA.R16@106.2,180.7 ; v1(105.8,181.9) FPGA.R14@106.2,182.3 ; v1(105.8,186.7) FPGA.R9@106.2,186.3 ; v1(105.8,190.7) FPGA.R4@106.2,190.3 ; v1(105.8,193.1) FPGA.R1@106.2,192.7 ; v1(106.097,107.325) 106.3,107.122 SRAM.5@106.3,106.3 ; v1(106.697,212.385) R37.2@107.747,212.385 ; v1(106.8,93.65) S1.2@106.8,94.5 ; v1(107.4,182.7) FPGA.N13@107.8,183.1 ; v1(107.4,183.5) FPGA.N12@107.8,183.9 ; v1(108.2,179.5) FPGA.M17@108.6,179.9 ; v1(108.2,189.1) FPGA.M6@108.6,188.7 ; v1(108.2,192.3) FPGA.M2@108.6,191.9 ; v1(108.4,144.05) GG.L7@108.8,144.45 ; v1(109,184.3) FPGA.L11@109.4,184.7 ; v1(109,186.7) FPGA.L9@109.4,186.3 ; v1(109.2,141.65) GG.K10@109.6,142.05 ; v1(109.2,144.05) GG.K7@109.6,144.45 ; v1(109.2,147.25) GG.K4@109.6,146.85 ; v1(109.8,185.1) FPGA.K10@110.2,185.5 ; v1(109.8,187.5) FPGA.K8@110.2,187.1 ; v1(110.8,144.85) GG.H6@111.2,145.25 ; FPGA.J15@111,181.5 v1(111.4,181.1) ; FPGA.J11@111,184.7 v1(111.4,184.3) ; FPGA.J9@111,186.3 v1(111.4,185.9) ; FPGA.J4@111,190.3 v1(111.4,190.7) ; v1(111.6,142.45) GG.G9@112,142.85 ; v1(111.6,148.05) GG.G3@112,147.65 ; FPGA.H10@111.8,185.5 v1(112.2,185.1) ; FPGA.H8@111.8,187.1 v1(112.2,187.5) ; v1(111.9,105.275) SRAM.12@111.9,106.3 ; v1(112.4,142.45) GG.F9@112.8,142.85 ; FPGA.G17@112.6,179.9 v1(113,179.5) ; FPGA.G12@112.6,183.9 v1(113,183.5) ; FPGA.G5@112.6,189.5 v1(113,189.9) ; FPGA.G2@112.6,191.9 v1(113,192.3) ; v1(113.5,116.575) SRAM.41@113.5,117.6 ; FPGA.E15@114.2,181.5 v1(114.6,181.1) ; GG.D4@114.4,146.85 v1(114.8,147.25) ; v1(114.9,93.65) S2.2@114.9,94.5 ; FPGA.D10@115,185.5 v1(115.4,185.1) ; FPGA.D5@115,189.5 v1(115.4,189.9) ; v1(115.1,116.575) SRAM.39@115.1,117.6 ; GG.C7@115.2,144.45 v1(115.6,144.05) ; FPGA.C16@115.8,180.7 v1(116.2,180.3) ; FPGA.C3@115.8,191.1 v1(116.2,191.5) ; FPGA.B13@116.6,183.1 v1(117,182.7) ; FPGA.B7@116.6,187.9 v1(117,188.3) ; v1(116.8,80.717) LED1.K@116.8,81.653 ; v1(117.17,111.43) 120.738,111.43 123.1,109.068 SRAM.26@123.1,106.3 ; FPGA.A18@117.4,179.1 v1(117.8,178.7) ; FPGA.A1@117.4,192.7 v1(117.8,193.1) ; SRAM.32@120.7,117.6 v1(120.7,118.625) ; v1(120.912,216.912) R39.1@120.912,217.962 ; v1(122.872,211.035) C63.2@123.947,211.035 ; v1(129.65,209.6) OA2.2@130.5,209.6 ; CG1.2@134.9,173.3 v1(136.606,173.3) ; U1.6@137.125,83.05 v1(137.95,83.05) ; v1(148.1,140.3) X2.2@148.1,141.6 ; X2.4@150.3,145.3 v1(150.3,146.6) ; v1(157.05,170.25) R48.2@158.1,170.25 ; v1(160.725,198.3) FPGA_FLASH.11@160.725,199.45 ; v1(164.775,172.3) C67.1@165.8,172.3
  Bottom Layer w0.1: C56.1@58.35,143.5 v1(59.375,143.5) ; C57.1@58.45,151.1 v1(59.475,151.1) ; C58.1@58.55,158.2 v1(59.575,158.2) ; C59.1@58.55,165.3 v1(59.575,165.3) ; C60.1@58.55,171.9 v1(59.575,171.9) ; v1(61,108.875) C51.1@61,109.9 ; v1(61.15,189.675) C54.1@61.15,190.7 ; R20.2@61.45,141.85 v1(62.5,141.85) ; R22.2@61.55,156.35 62.382,156.35 62.6,156.132 v1(62.6,155.944) ; R21.2@61.65,149.35 v1(62.7,149.35) ; v1(61.7,199.85) R14.2@61.7,200.9 ; R23.2@61.85,163.45 v1(62.9,163.45) ; R24.2@61.95,170.05 v1(63.406,170.05) ; v1(64.892,111.76) 64.892,111.335 65.227,111 C52.2@66.1,111 ; v1(68.9,185.35) R11.2@68.9,186.4 ; C53.1@81.3,104.7 81.3,103.586 81.548,103.339 v1(82.026,103.339) ; R8.2@84.5,108.25 v1(85.55,108.25) ; v1(89.3,184.775) C3.1@89.3,185.8 ; v1(90.18,178.064) C15.1@90.18,179.089 ; v1(93.202,192.364) C24.1@93.202,193.389 ; C33.1@94.7,143.8 v1(95.725,143.8) ; v1(95.768,178.064) C14.1@95.768,179.089 ; C34.1@97.4,155.5 97.4,154.635 97.61,154.425 v1(97.806,154.425) ; v1(97.471,184.864) C5.1@97.471,185.889 ; v1(97.6,182.675) C4.1@97.6,183.7 ; v1(98.8,188.875) C2.1@98.8,189.9 ; v1(99.044,192.364) C23.1@99.044,193.389 ; v1(99.8,172.275) C22.1@99.8,173.3 ; v1(101.356,178.064) C13.1@101.356,179.089 ; v1(103.2,151.775) C31.1@103.2,152.8 ; C32.1@103.8,141.2 v1(104.825,141.2) ; C38.1@105.1,146.7 v1(106.175,146.7) ; v1(107.375,172.7) C12.1@107.375,174.4 ; v1(110.8,150.972) C30.1@110.8,152.2 ; C11.1@112.4,174 112.4,172.886 112.647,172.639 v1(112.719,172.639) ; v1(117.6,194.575) C20.1@117.6,195.6 ; C40.1@118.4,138.1 v1(119.475,138.1) ; C39.1@120.7,142.9 121.864,142.9 122.111,143.148 v1(122.111,143.526) ; C1.2@120.7,145.75 v1(121.725,145.75) ; v1(121.575,172) C21.1@121.575,173.7 ; v1(123.301,192.364) C19.1@123.301,193.389 ; v1(123.633,184.864) C27.1@123.633,185.889 ; C29.1@123.7,158.8 v1(124.725,158.8) ; v1(123.835,178.064) C9.1@123.835,179.089 ; v1(124.5,188.575) C28.1@124.5,189.6 ; C36.1@126.6,146.5 v1(127.675,146.5) ; C37.1@126.8,138.6 v1(127.875,138.6) ; C35.1@126.8,152.2 v1(127.875,152.2) ; v1(128.2,172.175) C10.1@128.2,173.2 ; v1(128.889,192.364) C18.1@128.889,193.389 ; v1(129.602,184.864) C26.1@129.602,185.889 ; v1(130.252,176.5) C8.1@130.252,178.2 ; v1(132.575,83.1) C47.2@133.6,83.1 ; v1(134.477,192.364) C17.1@134.477,193.389 ; v1(135.646,178.064) C7.1@135.646,179.089 ; v1(135.775,83.1) C45.2@136.8,83.1 ; v1(136.019,183.3) C25.1@136.019,185 ; C46.1@139.5,83.1 v1(140.525,83.1) ; v1(140.472,178.064) C6.1@140.472,179.089 ; v1(140.894,190.8) C16.1@140.894,192.5 ; C44.2@148.4,141.4 148.4,140.607 148.742,140.265 v1(148.742,140.089) ; C42.1@149.7,148.9 v1(150.675,148.9) ; C43.2@150.1,145.3 150.1,144.342 150.113,144.33 v1(150.113,143.989) ; C41.1@150.7,155.6 v1(151.675,155.6)
GPIO0: R25.2
GPIO1: GG.H4 R26.2 | length 42.1
  Top Layer w0.1: v1(110.795,147.244) 110.806,147.244 GG.H4@111.2,146.85
  MidLayer3 w0.1: v1(72.6,151.105) 100.996,151.105 104.017,148.084 105.434,148.084 106.655,146.863 110.414,146.863 v1(110.795,147.244)
  Bottom Layer w0.1: R26.2@72.6,149.7 v1(72.6,151.105)
GPIO2: GG.H5 R27.2 | length 48
  Top Layer w0.1: v1(110.795,146.406) 110.844,146.406 GG.H5@111.2,146.05
  MidLayer3 w0.1: v1(72.034,151.994) 72.034,150.774 72.517,150.292 79.35,150.292 79.756,150.698 100.089,150.698 105.017,145.771 110.16,145.771 v1(110.795,146.406)
  Bottom Layer w0.1: v1(72.034,151.994) 72.2,152.159 R27.2@72.2,156.7
GPIO3: GG.J5 R28.2 | length 43.6
  Top Layer w0.1: v1(109.994,146.456) GG.J5@110.4,146.05
  Mid-Layer 6 w0.1: v1(91.402,164.3) 108.077,147.625 109.322,147.625 109.601,147.345 109.601,146.849 v1(109.994,146.456)
  Bottom Layer w0.1: R28.2@74.7,164.3 v1(91.402,164.3)
GPIO4: GG.J6 R29.2 | length 60.3
  Top Layer w0.1: v1(110.007,144.856) 110.211,145.059 110.4,145.059 GG.J6@110.4,145.25
  Mid-Layer 4 w0.1: v1(76.098,167.919) 97.942,167.919 98.374,167.488 98.374,153.391 101.956,149.809 107.29,149.809 107.874,149.225 107.874,145.085 108.509,144.45 109.779,144.45 110.007,144.678 v1(110.007,144.856)
  Bottom Layer w0.1: R29.2@72.5,171.5 72.517,171.5 v1(76.098,167.919)
GPIO5: B4.1 C56.2 GG.K5 R15.1 | length 59.1
  Top Layer w0.1: B4.1@65.05,140.8 v1(66.887,140.8) ; v1(109.195,146.456) GG.K5@109.6,146.05
  Mid-Layer 1 w0.1: v1(66.887,144.171) 68.69,145.974 108.712,145.974 v1(109.195,146.456)
  Mid-Layer 5 w0.1: v1(59.734,141.7) 61.112,143.078 v1(66.887,143.078)
  Bottom Layer w0.1: C56.2@58.35,141.7 v1(59.734,141.7) ; v1(66.887,140.8) v1(66.887,143.078) v1(66.887,144.171) R15.1@66.887,145.121
GPIO6: B5.1 C57.2 GG.D3 R16.1 | length 62.2
  Top Layer w0.1: B5.1@65.05,148 v1(66.396,148) v1(67.386,148) ; GG.D3@114.4,147.65 114.8,148.05 v1(114.8,148.057)
  Mid-Layer 1 w0.1: v1(59.69,149.758) v1(66.878,149.758) ; v1(67.386,148) 67.736,147.65 114.394,147.65 v1(114.8,148.057)
  Bottom Layer w0.1: C57.2@58.45,149.3 59.232,149.3 v1(59.69,149.758) ; v1(66.396,148) 66.887,148.492 v1@66.887,149.768 ; v1(66.878,149.758) v1@66.887,149.768 ; R16.1@66.887,150.709 v1@66.887,149.768
GPIO7: B6.1 C58.2 GG.C11 R17.1 | length 90.6
  Top Layer w0.1: v1(54.508,159.512) 54.52,159.5 B6.1@55.85,159.5 57.417,159.5 v1(57.429,159.512) ; v1(114.833,140.843) 115.022,140.843 115.2,141.021 GG.C11@115.2,141.25
  Mid-Layer 1 w0.1: v1(57.429,159.512) 57.429,148.565 66.192,139.802 106.618,139.802 106.703,139.717 113.707,139.717 v1(114.833,140.843)
  Bottom Layer w0.1: v1(54.508,159.512) 57.62,156.4 C58.2@58.55,156.4 59.538,156.4 60.541,157.404 63.652,157.404 64.759,156.297 R17.1@66.887,156.297
GPIO8: B7.1 C59.2 GG.L11 R18.1 | length 81.1
  Top Layer w0.1: v1(54.61,166.497) 54.613,166.5 B7.1@55.95,166.5 ; v1(107.772,140.741) 108.291,140.741 GG.L11@108.8,141.25
  Mid-Layer 6 w0.1: v1(54.61,166.497) 59.411,161.696 63.068,161.696 84.557,140.208 106.248,140.208 106.875,140.835 107.679,140.835 v1(107.772,140.741)
  Bottom Layer w0.1: v1(54.61,166.497) 57.607,163.5 C59.2@58.55,163.5 59.69,163.5 61.305,161.885 R18.1@66.887,161.885
GPIO9: B8.1 C60.2 GG.K11 R19.1 | length 71.9
  Top Layer w0.1: B8.1@55.85,173.4 56.921,173.4 v1(56.921,170.1) ; v1(109.195,140.843) 109.195,140.845 GG.K11@109.6,141.25
  Mid-Layer 6 w0.1: v1(59.563,170.1) 63.141,166.522 v1(66.878,166.522) ; v1(66.887,163.728) 72.298,158.318 86.665,158.318 103.416,141.567 108.471,141.567 v1(109.195,140.843)
  Bottom Layer w0.1: v1(56.921,170.1) C60.2@58.55,170.1 v1(59.563,170.1) ; v1(66.878,166.522) v1@66.887,166.532 ; v1(66.887,163.728) v1@66.887,166.532 ; R19.1@66.887,167.473 v1@66.887,166.532
GPIO10: GG.J9 P10.1 | length 39.8
  Top Layer w0.1: v1(109.993,142.443) GG.J9@110.4,142.85
  Mid-Layer 6 w0.1: P10.1@81.3,159.8 85.279,163.779 86.436,163.779 107.366,142.85 109.587,142.85 v1(109.993,142.443)
GPIO11: GG.J10 P10.2 | length 34.2
  Top Layer w0.1: v1(110.007,141.657) GG.J10@110.4,142.05
  Mid-Layer 6 w0.1: P10.2@83.84,159.8 86.402,159.8 104.102,142.1 109.563,142.1 v1(110.007,141.657)
GPIO12: GG.H8 P10.3 | length 40
  Top Layer w0.1: v1(110.795,143.256) 110.806,143.256 GG.H8@111.2,143.65
  Mid-Layer 6 w0.1: P10.3@81.3,157.26 82.375,156.185 87.376,156.185 102.794,140.767 105.816,140.767 106.262,141.213 108.114,141.213 109.037,140.29 110.134,140.29 110.363,140.518 110.363,142.824 v1(110.795,143.256)
GPIO13: GG.B5 P10.4 | length 41
  Top Layer w0.1: GG.B5@116,146.05 v1(116.42,146.47)
  MidLayer3 w0.1: P10.4@83.84,157.26 111.306,157.26 116.027,152.538 116.027,146.863 v1(116.42,146.47)
GPIO14: GG.C5 P10.5 | length 39.6
  Top Layer w0.1: GG.C5@115.2,146.05 115.6,146.45 v1(115.6,146.456)
  MidLayer3 w0.1: P10.5@81.3,154.72 82.426,153.594 102.591,153.594 106.934,149.25 115.011,149.25 115.219,149.043 115.219,146.837 v1(115.6,146.456)
GPIO15: GG.C4 P10.6 | length 39
  Top Layer w0.1: GG.C4@115.2,146.85 115.595,147.245 v1(115.595,147.295)
  Mid-Layer 1 w0.1: P10.6@83.84,154.72 88.56,150 112.85,150 114.559,151.709 114.908,151.709 115.24,151.377 115.24,147.65 v1(115.595,147.295)
GPIO16: GG.H3 P10.7 | length 32.8
  Top Layer w0.1: v1(110.795,148.057) 110.795,148.055 GG.H3@111.2,147.65
  Mid-Layer 1 w0.1: P10.7@81.3,152.18 82.575,150.905 82.575,149.149 83.312,148.412 110.439,148.412 v1(110.795,148.057)
GPIO17: GG.J3 P10.8 | length 28.4
  Top Layer w0.1: v1(110.007,148.057) 110.007,148.043 GG.J3@110.4,147.65
  MidLayer3 w0.1: P10.8@83.84,152.18 100.427,152.18 104.17,148.438 109.626,148.438 v1(110.007,148.057)
GPIO18: GG.F10 P10.9 | length 39.3
  Top Layer w0.1: v1(112.395,141.656) 112.406,141.656 GG.F10@112.8,142.05
  MidLayer3 w0.1: P10.9@81.3,149.64 91.05,139.89 113.246,139.89 113.563,140.208 113.563,141.072 112.979,141.656 v1(112.395,141.656)
GPIO19: GG.E11 P10.10 | length 33.6
  Top Layer w0.1: v1(113.2,140.85) GG.E11@113.6,141.25
  MidLayer3 w0.1: P10.10@83.84,149.64 99.697,149.64 108.088,141.249 112.801,141.249 v1(113.2,140.85)
GPIO20: GG.A7
GPIO21: GG.A10
GPIO22: GG.A11
GPIO_FPGA0: FPGA.A2 R12.2 | length 43.9
  Top Layer w0.1: FPGA.A2@117.4,191.9 117.803,192.303 v1(117.805,192.303)
  MidLayer3 w0.1: v1(84.252,191.11) 116.611,191.11 v1(117.805,192.303)
  Bottom Layer w0.1: R12.2@77.4,185.3 78.442,185.3 v1(84.252,191.11)
GPIO_FPGA1: FPGA.A3 R13.2 | length 48.8
  Top Layer w0.1: FPGA.A3@117.4,191.1 117.791,191.491 v1(117.791,191.505)
  Mid-Layer 1 w0.1: v1(72.6,194.005) 115.291,194.005 v1(117.791,191.505)
  Bottom Layer w0.1: v1(72.6,194.005) R13.2@72.6,196
GPIO_FPGA2: B2.1 C54.2 FPGA.A5 R9.1 | length 69.1
  Top Layer w0.1: B2.1@56.15,188.6 v1(59.3,188.6) ; v1(117.003,189.103) FPGA.A5@117.4,189.5
  Mid-Layer 1 w0.1: v1(62.941,189.687) 63.119,189.509 116.597,189.509 v1(117.003,189.103)
  Bottom Layer w0.1: R9.1@59.3,184.6 59.3,186.538 ; v1(59.3,188.6) 59.3,186.538 ; v1(62.941,189.687) v1@62.95,189.696 ; C54.2@62.95,190.7 v1@62.95,189.696 ; 59.3,186.538 59.706,186.944 62.137,186.944 62.95,187.757 v1@62.95,189.696